# Altium PCB CH592F-3MODE-MS-T0-1v2.PcbDoc
Units mil, origin at the board's own origin, x right, y up, seen from the top; angles counter-clockwise.
Board outline 1755.91 x 3080.25 mil, 2 copper layers (Top Layer, Bottom Layer); 61 components, 52 nets, 224 pads, 409 vias.
Unrouted connection lines stored in the file: 37.
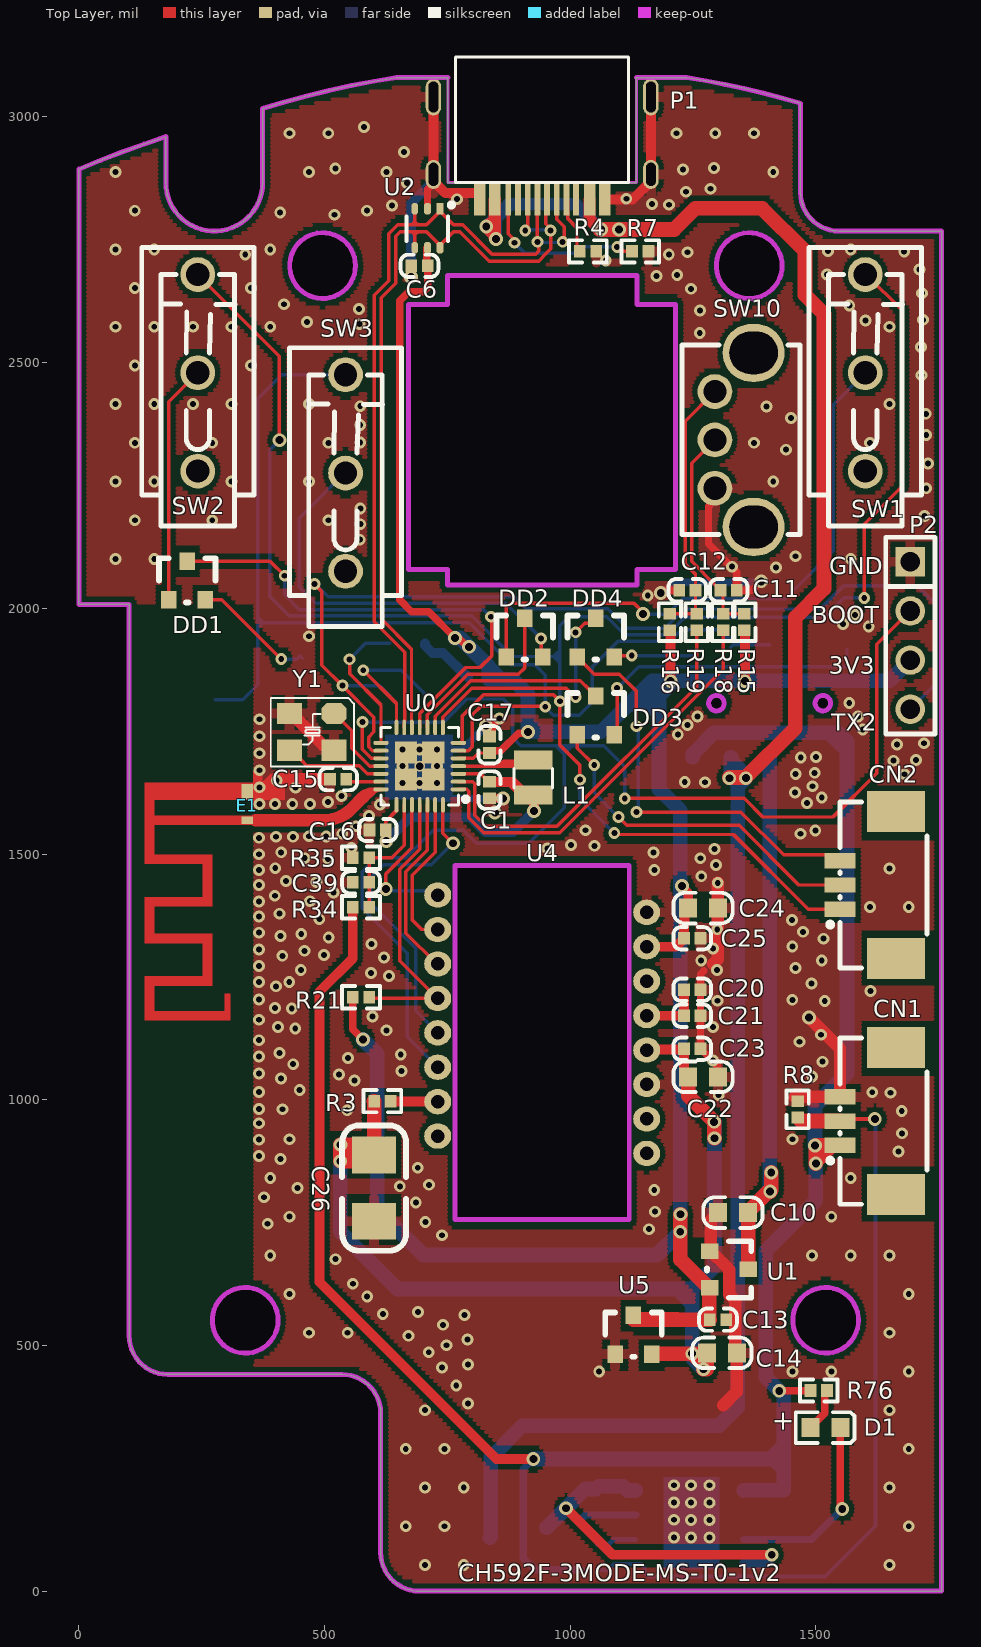
[diagram p0: Top Layer view]
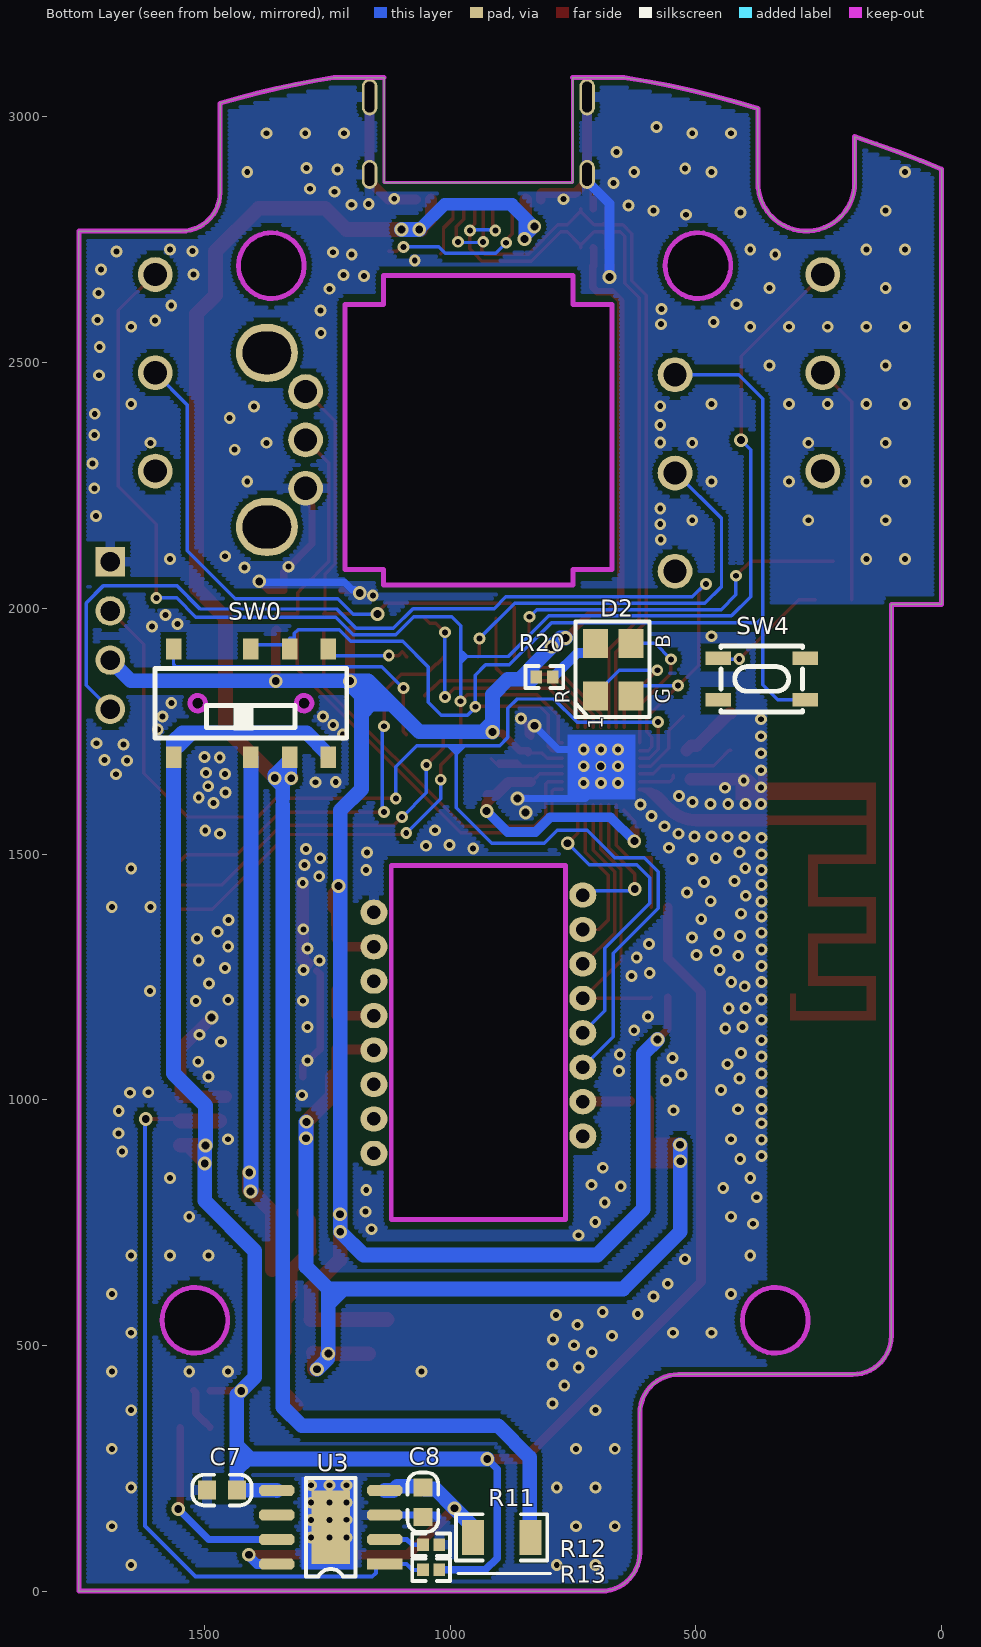
[diagram p1: Bottom Layer view, seen from below]

## Layer stack, top to bottom
Top Solder: solder mask 0.4, Solder Resist, Dk 3.5
Top Layer: signal copper 1.4
Dielectric 1: dielectric 12.6, FR-4, Dk 4.8
Bottom Layer: signal copper 1.4
Bottom Solder: solder mask 0.4, Solder Resist, Dk 3.5

## Board outline
181.1,440.94 535.43,440.94 cw(c535.43,362.2) 614.17,362.2 614.17,78.74 ccw(c692.91,78.74) 692.91,0 1755.91,0 1755.9,2767.72 1547.24,2767.72 cw(c1547.24,2846.46) 1468.5,2846.46 1468.5,3027.86 ccw(c961.44,1325.44) 1237.1,3080.25 1134.75,3080.25 1134.65,3080.15 1134.65,2866.41 751.18,2866.41 751.18,3080.16 ccw(c751.09,3080.16) 751.09,3080.25 750.99,3080.25 646.55,3080.25 ccw(c919.24,1285.52) 373.97,3017.03 374.02,3016.68 374.02,2866.14 cw(c275.59,2866.14) 177.17,2866.14 177.17,2960.1 176.96,2960.07 ccw(c982.43,543.44) 0,2893.7 0,2007.87 102.36,2007.87 102.36,519.69 ccw(c181.1,519.69)
cut-out: 496,2630.5 cw(c496,2697.43) 429.07,2697.43 cw(c496,2697.43) 496,2764.36 cw(c496,2697.43) 562.93,2697.43 cw(c496,2697.43)
cut-out: 1364.19,2630.5 cw(c1364.19,2697.43) 1297.26,2697.43 cw(c1364.19,2697.43) 1364.19,2764.36 cw(c1364.19,2697.43) 1431.12,2697.43 cw(c1364.19,2697.43)
cut-out: 1452.74,551.18 ccw(c1519.67,551.18) 1519.67,484.25 ccw(c1519.67,551.18) 1586.6,551.18 ccw(c1519.67,551.18) 1519.67,618.11 ccw(c1519.67,551.18)
cut-out: 271.67,551.18 ccw(c338.6,551.18) 338.6,484.25 ccw(c338.6,551.18) 405.53,551.18 ccw(c338.6,551.18) 338.6,618.11 ccw(c338.6,551.18)
cut-out: 765.75,755.91 1120.08,755.91 1120.08,1476.38 765.75,1476.38
cut-out: 671.26,2078.74 671.26,2618.11 750,2618.11 750,2677.17 1135.83,2677.17 1135.83,2618.11 1214.57,2618.11 1214.57,2078.74 1135.83,2078.74 1135.83,2047.24 750,2047.24 750,2078.74

## Design rules (kind name [scope] priority, off if disabled: settings)
Clearance Clearance_2 [InNet('ANT') vs InPolygon] p1: gap=6 ignorepadtopadclearanceinfootprint=FALSE
Clearance Clearance_1 [InPolygon] p2: gap=10 ignorepadtopadclearanceinfootprint=FALSE
Clearance [All] p3: gap=6 ignorepadtopadclearanceinfootprint=FALSE except(8: Arc-Via Track-Via SMDPad-Via THPad-Via Via-Via Via-Fill Via-Poly Via-Region Via-Hole)
ComponentClearance [All] p1 off: gap=10 collisioncheckmode=3 verticalgap=10 showdistances=FALSE
DiffPairsRouting [All] p1: maxlimit=10 minlimit=7 mostfreqgap=8 toplayer_minwidth=6 toplayer_maxwidth=15 toplayer_prefwidth=8 bottomlayer_minwidth=6 bottomlayer_maxwidth=15 bottomlayer_prefwidth=8 maxuncoupledlength=500
MinimumSolderMaskSliver [All] p1 off: minsoldermaskwidth=10
PolygonConnect PolygonConnect_1 [IsVia] p1: connectstyle=Direct reliefconductorwidth=10 reliefentries=4 polygonreliefangle="90 Angle" airgapwidth=10
PolygonConnect [All] p2: connectstyle=Relief reliefconductorwidth=20 reliefentries=4 polygonreliefangle="90 Angle" airgapwidth=10
RoutingVias [All] p1: holewidth=16 width=28 viastyle="Through Hole" minholewidth=12 minwidth=24 maxholewidth=28 maxwidth=50
SilkToSilkClearance [All] p1 off: silktosilkclearance=10
SilkToSolderMaskClearance [IsPad] p1 off: minsilkscreentomaskgap=10 clearancetoexposedcopper=TRUE
SolderMaskExpansion [All] p1: expansion=2 istentingtop=FALSE
Width [All] p1: maxlimit=100 minlimit=6 preferedwidth=10
25 further rules are at their usual default settings.

## Classes and differential pairs
differential pair UD: +UD+ -UD-

## Components (designator, comment, footprint, x,y, rotation, side; value= is the part's Value field where it differs from the comment)
C1 "4.7uF" 0402_C 835.7,1613.42 r180 top
C6 "0.1uF" 0402_C 676.58,2697.03 r90 top
C7 "10uF" 0603_C 1434.35,205.72 r0 bottom
C8 "10uF" 0603_C 1055.74,211.33 r270 bottom
C10 "10uF" 0603_C 1361.35,770.47 r180 top
C11 "10nF" 0402_C 1339.15,2037.01 r270 top
C12 "10nF" 0402_C 1221.48,2037.01 r90 top
C13 "2.2uF" 0402_C 1284.01,552.47 r90 top
C14 "10uF" 0603_C 1278.24,484.96 r0 top
C15 "0.47uF" 0402_C 544.55,1652.45 r270 top
C16 "0.1uF" 0402_C 624.88,1548.88 r270 top
C17 "2.2uF" 0402_C 835.7,1739.16 r0 top
C20 "4.7uF" 0402_C 1231.5,1224.03 r90 top
C21 "100nF" 0402_C 1231.5,1170.88 r90 top
C22 "10uF" 0603_C 1239.97,1046.57 r0 top
C23 "100nF" 0402_C 1231.5,1103.74 r90 top
C24 "10uF" 0603_C 1239.97,1390.05 r0 top
C25 "100nF" 0402_C 1231.5,1328.71 r90 top
C26 "33uF" 3528_C 600.92,887.83 r90 top
C39 "0.1uF" 0402_C 590.83,1442.34 r270 top
CN1 "YTC-A1251-03ABW" CONN-SMD_3P-P1.25_YTC-A1251-03ABW 1606.08,956.7 r90 top
CN2 "YTC-A1251-03ABW" CONN-SMD_3P-P1.25_YTC-A1251-03ABW 1606.08,1437.01 r90 top
D1 "LED" 0603+ 1488.97,332.96 r0 top
D2 "RGB" RGB 704.23,1821.93 r90 bottom
DD1 "DIODE" SOT-23 220.3,2056.77 r0 top
DD2 "DIODE" SOT-23 907.03,1940.39 r0 top
DD3 "DIODE" SOT-23 1051.8,1782.24 r0 top
DD4 "DIODE" SOT-23 1051.8,1940.39 r0 top
E1 "ANTENNA" ANT-F-1-2.4G-1.0mmFR4 342.49,1568.85 r90 top
L1 "10uH" SMD_2x2mm 924.65,1655.74 r270 top
P1 "TYPE-C-Receptacle-2.0" TYPE-C-Receptacle-2.0-6.5*8.94*3.16-SinkDown 1069.88,2829.92 r270 top
P2 "DEBUG" SIP4-2.54mm 1692.03,2094.7 r0 top
R3 "5.6Ω" 0402 600.85,997.18 r0 top
R4 "5.1K" 0402 1019.29,2726.36 r0 top
R7 "5.1K" 0402 1159.23,2726.36 r180 top
R8 "0Ω(NC)" 0402 1462.69,963.79 r90 top
R11 "400mΩ" 1206 836.72,109.38 r0 bottom
R12 "3.3k" 0402 1055.66,94.39 r180 bottom
R13 "NC(3.3k)" 0402 1022.19,43.25 r0 bottom
R15 "NC" 0402 1354,1988.71 r270 top
R16 "NC" 0402 1202.7,1955.24 r90 top
R18 "100Ω" 0402 1311.32,1988.71 r270 top
R19 "100Ω" 0402 1257.5,1955.24 r90 top
R20 "1K" 0402 825.2,1860.25 r180 bottom
R21 "10K" 0402 557.37,1208.58 r0 top
R34 "300K" 0402 590.83,1391.69 r180 top
R35 "150K" 0402 557.37,1492.52 r0 top
R76 "1K" 0402 1522.44,408.32 r180 top
SW0 "HX MSS23C02-H2.0 125" SW-SMD_HX-MSS23C02-H2.0-125 1405.77,1807.07 r0 bottom
SW1 "3JWD-DBHD-13.5 125" SW-TH_SHOU-HAN_3JWD-DBHD-13.5 1600.4,2479.3 r270 top
SW2 "3JWD-DBHD-13.5 125" SW-TH_SHOU-HAN_3JWD-DBHD-13.5 242.14,2479.3 r270 top
SW3 "3JWD-DBHD-13.5 125" SW-TH_SHOU-HAN_3JWD-DBHD-13.5 542.7,2275.35 r270 top
SW4 "TS-1089S-02526" SW-SMD_4P-L4.2-W3.3-P2.15-LS5.1 366.13,1856.28 r180 bottom
SW10 "EC10E1260507" SW-TH_EC10EXXXXXXX 1347.54,2342.8 r270 top
U0 "CH592F" QFN28_4X4 693.62,1678.88 r90 top
U1 "6219P33M" SOT-23 1323.05,654.74 r270 top
U2 "CH412K" SOT-363 734.97,2812.81 r180 top
U3 "TP4056" ESOP8 1133.3,55 r90 bottom
U4 "PAW3395DM-T6QU" DIP-16_PAW3395DM-T6QU 942.91,1140.23 r180 top
U5 "6219P18M" SOT-23 1128.68,521.78 r0 top
Y1 "32M" XT3225 519.46,1786.02 r180 top

## Footprints (in the part's own frame and the unit in brackets; to place one, negate y for a bottom-side part, rotate by r counter-clockwise, add the part's x,y. Pads: shape width x height; smd on the part's side, far side on the other; paste and mask are expansions set on the pad)
0402 [mm]
  rect 0.6x0.65 smd mask+0.051: 1(0,0) 2(0.85,0)
  silkscreen extent -0.55,-0.58 1.4,0.57
0402_C [mm]
  rect 0.65x0.6 smd mask+0.051: 1(0,0) 2(0,-0.85)
  silkscreen extent -0.58,-1.4 0.57,0.55
0603+ [mm]
  rect 0.93x0.98 smd: 1(0,0) 2(1.54,0)
  silkscreen extent -0.76,-0.79 2.27,0.79
0603_C [mm]
  rect 0.93x0.98 smd mask+0.051: 1(0,0) 2(1.54,0)
  silkscreen extent -0.76,-0.79 2.31,0.79
1206 [mm]
  rect 1.13x1.8 smd: 1(0,0) 2(2.98,0)
  silkscreen extent -0.87,-1.2 3.84,1.2
3528_C [mil]
  rect 75x90 smd: 1(0,0) 2(-135,0)
  silkscreen extent -195,-65 60,65
ANT-F-1-2.4G-1.0mmFR4 [mm]
  rect 0.8x0.6 smd mask+0: 0(1.483,0)
  rect 0.4x0.6 smd mask+0: 1(0,0)
  Top Layer region: -8.96,1.16 -10.36,1.16 -10.36,0.86 -8.96,0.86
  Top Layer region: 0.24,5.03 -0.26,5.03 -0.26,-0.3 0.24,-0.3
  Top Layer region: 1.939,5.005 1.039,5.005 1.039,-0.3 1.939,-0.3
  Top Layer region: 1.94,5.3 -2.26,5.3 -2.26,4.8 1.94,4.8
  Top Layer region: -1.76,4.98 -2.26,4.98 -2.26,1.8 -1.76,1.8
  Top Layer region: -1.85,2.3 -4.39,2.3 -4.39,1.8 -1.85,1.8
  Top Layer region: -3.96,4.98 -4.46,4.98 -4.46,1.8 -3.96,1.8
  Top Layer region: -3.96,5.3 -6.36,5.3 -6.36,4.8 -3.96,4.8
  Top Layer region: -5.86,4.98 -6.36,4.98 -6.36,1.8 -5.86,1.8
  Top Layer region: -5.875,2.3 -8.364,2.3 -8.364,1.8 -5.875,1.8
  Top Layer region: -8.06,4.98 -8.56,4.98 -8.56,1.8 -8.06,1.8
  Top Layer region: -8.06,5.3 -10.36,5.3 -10.36,4.8 -8.06,4.8
  Top Layer region: -9.86,4.98 -10.36,4.98 -10.36,0.86 -9.86,0.86
CONN-SMD_3P-P1.25_YTC-A1251-03ABW [mm]
  rect 0.8x1.6 smd paste+0 mask+0.05: 1(-1.25,1.45) 2(0,1.45) 3(1.25,1.45)
  rect 2.1x3 smd paste+0 mask+0.05: 4(-3.8,-1.45) 5(3.8,-1.45)
  silkscreen extent -4.3,-3.05 4.3,2.08
DIP-16_PAW3395DM-T6QU [mm]
  oval 1.397x1.3 hole 0.7 paste+0 mask+0.051: 1(-5.4,6.332) 2(-5.4,4.552) 3(-5.4,2.772) 4(-5.4,0.992) 5(-5.4,-0.788) 6(-5.4,-2.568) 7(-5.4,-4.348) 8(-5.4,-6.128) 9(5.4,-7.018) 10(5.4,-5.238) 11(5.4,-3.458) 12(5.4,-1.678) 13(5.4,0.102) 14(5.4,1.882) 15(5.4,3.662) 16(5.4,5.442)
ESOP8 [mil]
  rect 149.61x78.74 smd: 0(75,110)
  rect 22x72 smd: 1(0,0)
  oct 22x72 smd: 2(50,0) 3(100,0) 4(150,0) 5(150,220) 6(100,220) 7(50,220) 8(0,220)
  silkscreen extent -25,60 175,160
QFN28_4X4 [mm]
  rect 1.143x1.143 smd mask+0: 0(-0.699,-0.699) 0(-0.699,0.698) 0(0.699,-0.699) 0(0.699,0.698)
  round 0.559 hole 0.381 mask+0.051: 0(0,0)
  oval 0.2x0.8 smd mask+0.051: 1(-1.2,-2) 2(-0.8,-2) 3(-0.4,-2) 4(0,-2) 5(0.4,-2) 6(0.8,-2) 7(1.2,-2) 15(1.2,2) 16(0.8,2) 17(0.4,2) 18(0,2) 19(-0.4,2) 20(-0.8,2) 21(-1.2,2)
  oval 0.8x0.2 smd mask+0.051: 8(2,-1.2) 9(2,-0.8) 10(2,-0.4) 11(2,0) 12(2,0.4) 13(2,0.8) 14(2,1.2) 22(-2,1.2) 23(-2,0.8) 24(-2,0.4) 25(-2,0) 26(-2,-0.4) 27(-2,-0.8) 28(-2,-1.2)
  silkscreen extent -2,-2.51 2,2
RGB [mm]
  rect 1.5x1.3 smd: 1(0,0) 2(2.71,0) 3(0,-1.825) 4(2.71,-1.825)
  silkscreen extent -1.09,-2.79 3.84,1.04
SIP4-2.54mm [mil]
  rect 60x60 hole 40: 1(0,0)
  round 60 hole 40: 2(0,-100) 3(0,-200) 4(0,-300)
  silkscreen extent -50,-350 50,50
SMD_2x2mm [mm]
  rect 1x2 smd: 1(-0.905,0) 2(0.905,0)
  silkscreen extent -0.47,-1 0.53,1
SOT-23 [mm]
  rect 0.8x0.9 smd: 1(-0.95,-1) 2(0.95,-1) 3(0,1)
  silkscreen extent -1.46,-1.14 1.46,1.15
SOT-363 [mm]
  rect 0.35x0.6 smd mask+0.051: 1(0,0)
  oct 0.35x0.6 smd mask+0.051: 2(0.65,0) 3(1.3,0) 4(1.3,2) 5(0.65,2) 6(0,2)
  silkscreen extent -0.7,-0.31 1.73,1.65
SW-SMD_4P-L4.2-W3.3-P2.15-LS5.1 [mm]
  rect 1.3x0.7 smd: 1(-2.25,1.075) 2(2.25,1.075) 3(-2.25,-1.075) 4(2.25,-1.075)
  silkscreen extent -2.1,-1.7 2.1,1.7
SW-SMD_HX-MSS23C02-H2.0-125 [mm]
  rect 0.8x1.1 smd paste+0 mask+0.05: 1(-4,2.8) 2(-2,2.8) 3(0,2.8) 4(4,2.8) 5(-4,-2.8) 6(-2,-2.8) 7(0,-2.8) 8(4,-2.8)
  Keep-Out Layer board cut-out: -2.35,0 -2.406,0.197 -2.552,0.34 -2.75,0.393 -2.948,0.34 -3.094,0.197 -3.15,0 -3.15,0 -3.094,-0.197 -2.948,-0.34 -2.75,-0.393 -2.552,-0.34 -2.406,-0.197 -2.35,0
  Keep-Out Layer board cut-out: 3.15,0 3.11,0.174 2.999,0.313 2.839,0.39 2.661,0.39 2.501,0.313 2.39,0.174 2.35,0 2.35,0 2.39,-0.174 2.501,-0.313 2.661,-0.39 2.839,-0.39 2.999,-0.313 3.11,-0.174 3.15,0
  Multi-Layer pour cut-out: -2.35,0 -2.406,0.197 -2.552,0.34 -2.75,0.393 -2.948,0.34 -3.094,0.197 -3.15,0 -3.15,0 -3.094,-0.197 -2.948,-0.34 -2.75,-0.393 -2.552,-0.34 -2.406,-0.197 -2.35,0
  Multi-Layer pour cut-out: 3.15,0 3.11,0.174 2.999,0.313 2.839,0.39 2.661,0.39 2.501,0.313 2.39,0.174 2.35,0 2.35,0 2.39,-0.174 2.501,-0.313 2.661,-0.39 2.839,-0.39 2.999,-0.313 3.11,-0.174 3.15,0
  silkscreen extent -4.95,-1.8 4.95,1.8
SW-TH_EC10EXXXXXXX [mm]
  oval 3x3.2 hole 2.2 slot 2.5 at 90 deg paste+0 mask+0.051: 4(-4.5,0.65) 5(4.5,0.65)
  round 1.8 hole 1.2 paste+0 mask+0.051: A(-2.5,-1.35) B(0,-1.35) C(2.5,-1.35)
  silkscreen extent -4.9,-3.05 4.9,3.05
SW-TH_SHOU-HAN_3JWD-DBHD-13.5 [mm]
  round 1.8 hole 1.2: 1(-5.08,0) 2(0,0) 3(5.08,0)
  silkscreen extent -6.48,-2.9 7.92,2.9
TYPE-C-Receptacle-2.0-6.5*8.94*3.16-SinkDown [mm]
  oval 1.9x0.8 hole 0.5 slot 1.6 at 0 deg mask+0.051: 0(-5.352,2.395) 0(-5.352,-8.845)
  oval 1.5x0.8 hole 0.5 slot 1.2 at 0 deg mask+0.051: 0(-1.352,2.395) 0(-1.352,-8.845)
  rect 1.65x0.6 smd mask+0.051: A1(-0.05,0) A4(-0.05,-0.775) B1(-0.05,-6.45) B4(-0.05,-5.675)
  rect 1.65x0.3 smd mask+0.051: A5(-0.05,-1.975) A6(-0.05,-2.975) A7(-0.05,-3.475) A8(-0.05,-4.475) B5(-0.05,-4.975) B6(-0.05,-3.975) B7(-0.05,-2.475) B8(-0.05,-1.475)
  Keep-Out Layer lines w0.152: -6.358,-8.095 -0.927,-8.095 -0.927,1.645 -6.356,1.645
  silkscreen extent -7.43,-7.69 -0.93,1.25
XT3225 [mm]
  oct 1.3x1.1 smd: 1(0,0)
  rect 1.3x1.1 smd: 2(2.3,0) 3(2.3,1.9) 4(0,1.9)
  silkscreen extent -1.02,-0.8 3.27,2.74

## Part data
C1 C6 C7 C8 C11 C12 C15 C16 C17 C39: library part CAP, "Capacitor"
C10 C13 C14 C20 C21 C22 C23 C24 C25 C26: library part Cap, "Capacitor", LatestRevisionDate=17-Jul-2002, LatestRevisionNote="Re-released for DXP Platform.", PackageDescription="Radial Cap, Thru-Hole; 2 Leads; 0.3 in Pin Spacing", PackageReference=RAD-0.3, Published=8-Jun-2000, Publisher="Altium Limited"
CN1 CN2: Current Rating (Max)=1A, JLCPCB Part Class="Extended Part", LCSC Part Name="1.25mm 1x3P卧贴", Manufacturer=YIYUAN(怡远), Operating Temperature Range=-25℃~+85℃, Add into BOM=yes, Convert to PCB=yes, Datasheet=https://atta.szlcsc.com/upload/public/pdf/source/20230703/1435987A1D1278BD8E0276EA6FE76C2F.pdf, Device=YTC-A1251-03ABW, Manufacturer Part=YTC-A1251-03ABW, Mounting Style=卧贴, Number of Pins=3P, Number of PINs Per Row=3, Number of Rows=1, Pins Structure=1x3P, Pitch=1.25mm, Supplier=LCSC, Supplier Footprint=P=1.25mm, Supplier Part=C7436576, Symbol=YTC-A1251-03ABW
D1: library part LED0, "Typical INFRARED GaAs LED", LatestRevisionDate=08-Jul-2005, LatestRevisionNote="Mech Layer 1 removed.", PackageDescription="LED; 2 Leads", PackageReference=LED-0, Published=8-Jun-2000, Publisher="Altium Limited"
D2: "共阳"
DD1 DD2 DD3 DD4: "Diode"
E1: "Generic Antenna"
L1: library part INDUCTOR
P1: "Type-C USB2.0 母座"
P2: library part "Header 4", "Header, 4-Pin", LatestRevisionDate=17-Jul-2002, LatestRevisionNote="Re-released for DXP Platform.", Publisher="Altium Limited"
R3 R20 R21: library part Res2, "Resistor", LatestRevisionDate=17-Jul-2002, LatestRevisionNote="Re-released for DXP Platform.", PackageDescription="Axial Device, Thru-Hole; 2 Leads; 0.4 in Pin Spacing", PackageReference=AXIAL-0.4, Published=8-Jun-2000, Publisher="Altium Limited"
R4 R7: library part RES2
R8 R11 R12 R13 R15 R16 R18 R19 R34 R35 R76: library part RES
SW0: Current Rating (DC)=100mA, LCSC Part Name="小型8脚3档位 立贴拨动 柄长2.0MM", Manufacturer=hanxia(韩下), Operating Temperature=-25℃~+70℃, Voltage Rating (DC)=12V, Actuator Style=矩形柱状, Add into BOM=yes, Circuit=双刀三掷, Convert to PCB=yes, Datasheet=https://atta.szlcsc.com/upload/public/pdf/source/20231016/0AB1F9BA5921398E4CF86D5ACEC95738.pdf, Device="HX MSS23C02-H2.0 125", Manufacturer Part="HX MSS23C02-H2.0 125", Mechanical Life=1万次, Mounting Style=立贴, Pin Style=SMD接片, Supplier=LCSC, Supplier Footprint=SMD,9.9x3.5mm, Supplier Part=C18357575, Symbol="HX MSS23C02-H2.0 125"
SW1 SW2 SW3: Contact Current (AC)=-, Contact Current (DC)=100mA, JLCPCB Part Class="Extended Part", LCSC Part Name="12.8*5.7*6.6mm 插件微动开关", Manufacturer="SHOU HAN(首韩)", Operating Temperature=-25℃~+85℃, Voltage Rating (DC)=125V, Actuator Style=脚按动, Add into BOM=yes, Circuit=单刀双掷, Convert to PCB=yes, Datasheet=https://atta.szlcsc.com/upload/public/pdf/source/20211019/52ACE125E0FDD69DD4046775F52831F0.pdf, Device="3JWD-DBHD-13.5 125", Manufacturer Part="3JWD-DBHD-13.5 125", Mechanical Life=100万次, Pin Style=PC引脚, Supplier=LCSC, Supplier Footprint=插件, Supplier Part=C2906291, Switch Height=6.6mm, Switch Length=12.8mm, Switch Width=5.7mm, Symbol="3JWD-DBHD-13.5 125", Type=微动开关, Voltage Rating (AC)=-
SW4: Contact Current=50mA, JLCPCB Part Class="Extended Part", LCSC Part Name="4.2*3.25*2.5mm 立贴 轻触开关", Manufacturer=XUNPU(讯普), Voltage Rating (DC)=12V, Actuator Style=椭圆形按钮, Add into BOM=yes, Circuit=单刀单掷, Convert to PCB=yes, Datasheet=https://atta.szlcsc.com/upload/public/pdf/source/20191118/C455282_2E86A26A9CC4FEF4662951C4D45ED672.pdf, Device=TS-1089S-02526, Manufacturer Part=TS-1089S-02526, Mechanical Life=-, Mounting Style=立贴, Supplier=LCSC, Supplier Footprint=SMD,3.3x4.2mm, Supplier Part=C455282, Switch Height=2.5mm, Switch Length=4.2mm, Switch Width=3.25mm, Symbol=TS-1089S-02526, With Lamp=-
U0: "RISC-V MCU with BLE/USB/ADC/SPI/4*UART/I2C/LCD"
U2: "Qaud ESD protect, high speed"
U5: library part 6219P33M
Y1: library part XTAL, "Crystal Oscillator", LatestRevisionDate=17-Jul-2002, LatestRevisionNote="Re-released for DXP Platform.", PackageDescription="Crystal, Thru-Hole; 2 Leads; Body 3.1 x 8.2 mm (Dia.xH)", PackageReference=R38, Published=8-Jun-2000, Publisher="Altium Limited"

## Via types
v1: diameter 24, hole 12, Top Layer to Bottom Layer, tented both sides, 365 vias
v2: diameter 28, hole 16, Top Layer to Bottom Layer, tented both sides, 44 vias

## Nets (pads, with @x,y where several pads share a name; then routed paths per layer and width w, separated by ;. In a path a pad name is that pad's centre, name@x,y a point inside that pad or via, vN(x,y) a via of type N, cw(c..) or ccw(c..) an arc to the next point about the centre after c; other vN are vias at no path point)
2.4G: DD3.2 SW0.8 | length 617.1
  Top Layer w7: DD3.2 1095.77,1749.43 1095.35,1749.86 v1(1095.35,1837.67)
  Bottom Layer w7: v1(1095.35,1837.67) 1139.25,1881.58 1559.15,1881.58 1563.25,1885.68 SW0.8
+1.9V: C14.1 C22.1 C23.1 C26.1 R3.1 U4.4 U5.2 | length 2341.7
  Top Layer w20: U4.4 1156.79,1102.46 1219.39,1102.46 ; C23.1 1231.5,1076.94 1231.66,1076.78 1231.66,1054.88 C22.1
  Top Layer w30: R3.1 600.92,997.1 C26.1 ; U5.2@1166.08,483.35 v2(1248.12,483.35) ; C22.1 1239.97,1007.96 v2(1292.85,955.08) 1292.85,922.34 v2(1293.4,921.79) ; C14.1@1276.63,483.35 v2(1248.12,483.35) ; C14.1 1277.11,483.83 1277.11,451.5 v2(1271.08,451.5) 1271.08,460.39 v2(1248.12,483.35) ; 531.9,891.27 C26.1@597.47,891.27 ; 531.9,891.27 531.9,907.63 v2(532.71,908.44) 580.3,908.44 C26.1@597.47,891.27 ; 531.9,891.27 v2(531.9,874.92) 588.01,874.92 C26.1 ; C26.1@597.47,891.27 C26.1
  Bottom Layer w30: v2(532.71,908.44) 531.9,907.63 v2(531.9,874.92) 531.9,731.28 648.06,615.13 1216.41,615.13 ; v2(1271.08,451.5) 1249.65,472.93 1249.65,481.82 v2(1248.12,483.35) 1248.12,583.42 ; v2@1293.4,954.53 v2(1293.4,921.79) 1293.4,660.41 1248.12,615.13 ; 1216.41,615.13 1248.12,583.42 ; 1216.41,615.13 1248.12,615.13 ; 1248.12,583.42 1248.12,615.13
+3V3: C6.2 C13.1 C17.2 C24.1 C25.1 P2.3 R15.2 R16.1 R20.1 R21.1 U0.5 U1.2 U2.5 U4.7 U5.3 | length 5651.2
  Top Layer w7: U0.5 802.83,1694.63 813.9,1705.7 C17.2 840.99,1705.7 C17.2@842.7,1705.7
  Top Layer w15: R21.1 557.37,1143.41 v2(578.1,1122.67) ; C6.2@708.06,2697.03 708.06,2732.75 U2.5 ; C6.2 710.04,2653.42 701.26,2644.63 671.62,2644.63 652.76,2625.77 652.76,2017.63 676.95,1993.44 711.81,1993.44 v2(765.46,1939.79) 767.94,1937.3 775.17,1937.3 790.81,1921.66 v2(794.19,1921.66) ; C17.2@840.99,1705.7 840.99,1710.01 858.54,1710.01 894.6,1746.07 911.89,1746.07 v2(914.05,1748.23)
  Top Layer w20: U4.7 1215.19,1311.41 1231.5,1327.73 C25.1 1231.5,1355.51 1232.76,1356.76 1232.76,1382.84 C24.1 1239.97,1420.22 1227.58,1432.61 v2(1227.58,1434.78) ; R16.1 1204.34,1953.6 v2(1204.34,1851.81) ; R15.2 1355.3,1953.95 v2(1355.3,1851.81)
  Top Layer w30: U5.3@1128.68,552.74 1217.98,552.74 1218.25,552.47 C13.1 ; v2(1224.42,766.88) 1224.42,765.33 1223.92,764.84 v2(1223.92,731.45) 1223.92,675.13 1281.72,617.34 U1.2@1282.75,617.34 ; C13.1@1282.75,552.79 U1.2@1282.75,617.34 ; U1.2 U1.2@1282.75,617.34
  Bottom Layer w20: v2(914.05,1748.23) 940.93,1748.23 ; 914.05,1775.86 940.93,1748.99 ; 960.84,1748.23 1062.53,1748.23 1063.28,1748.99
  Bottom Layer w30: v2(578.1,1122.67) 607.1,1093.67 607.1,777.64 700.62,684.13 1176.6,684.13 v2(1223.92,731.45) 1223.92,1588.83 1180.76,1631.99 1180.76,1785.18 ; v2(765.46,1939.79) 775.7,1939.79 834.62,1880.87 ; v2(914.05,1748.23) v2@914.05,1748.99 ; 1149.67,1816.27 1140.12,1825.82 ; v2@1204.34,1852.66 1186.07,1852.66 ; P2.3 1649.99,1852.66 1210.77,1852.66 1180.76,1822.65 1180.76,1785.18 ; 858.33,1855.88 833.98,1880.23 833.98,1855.88 858.33,1855.88 ; 858.33,1855.88 882.67,1855.88 914.05,1824.5 914.05,1775.86 v2@914.05,1748.99 ; v2@914.05,1748.99 940.93,1748.99 1063.28,1748.99 1119.11,1804.81 ; 1119.11,1804.81 1159.75,1804.81 1160.44,1805.5 ; 1119.11,1804.81 1140.12,1825.82 ; 1140.12,1825.82 1166.96,1852.66 1186.07,1852.66 ; 1160.44,1805.5 1159.75,1806.19 1159.75,1826.34 1186.07,1852.66 ; 1160.44,1805.5 1180.76,1785.18
ADC: C39.1 R34.1 R35.2 U0.23 | length 264.7
  Top Layer w7: R34.1 R35.2 636.49,1492.52 662.12,1518.15 U0.23
ANT: E1.1 U0.21 | length 362.4
  Top Layer w8: 571.6,1620.95 cw(c597.4,1595.15) 597.4,1631.64 U0.21 ; 578.48,1615.82 579.75,1617.09 cw(c614.88,1581.96) U0.21 ; 583.16,1608.47 600.29,1625.6 cw(c614.88,1611.01) U0.21
  Top Layer w25: 359.5,1568.85 498.64,1568.85 ccw(c498.64,1648.2) 554.75,1592.09 578.48,1615.82
B: D2.4 U0.15 | length 291.4
  Top Layer w7: v1(550.98,1896.26) 550.98,1867.27 614.88,1803.37 U0.15
  Bottom Layer w7: v1(550.98,1896.26) 583.33,1928.62 D2.4
Back: CN2.3 DD4.1 | length 854.8
  Top Layer w7: DD4.1 1014.4,1899.05 1026.65,1886.81 1028.62,1886.81 1049.11,1866.31 1099.94,1866.31 1134.75,1831.5 v1(1134.75,1760.07) ; v1(1134.64,1585.45) 1347.23,1585.45 1434.2,1498.47 1536.75,1498.47 CN2.3
  Bottom Layer w7: v1(1134.64,1585.45) 1138.33,1589.13 1138.33,1756.5 v1(1134.75,1760.07)
BLE: DD4.2 SW0.5 | length 173.9
  Top Layer w7: DD4.2 1088.32,1901.91 1097.87,1911.45 1105.43,1903.89 v1(1125.12,1903.89)
  Bottom Layer w7: v1(1125.12,1903.89) SW0.5@1253.87,1903.89
BOOT: P2.2 U0.17 U4.14 | length 2879
  Top Layer w7: v1(577.06,1768.5) 576.63,1768.07 576.63,1712.91 594.91,1694.63 U0.17 ; v1(1110.84,1613.15) 1354.32,1613.15 1392.02,1575.45 1534.63,1575.45 1623.97,1664.78 1623.97,1926.64 P2.2
  Bottom Layer w7: v1(577.06,1768.5) 742.04,1768.5 789.11,1815.57 863.95,1815.57 882.66,1796.87 882.66,1737.19 899.63,1720.23 970.71,1720.23 ; U4.14 668.53,1127.91 668.53,1297.84 576.74,1389.63 576.74,1464.31 605.18,1492.75 665.07,1492.75 720.91,1548.59 782.25,1548.59 808.98,1521.87 915.74,1521.87 987.86,1593.99 987.86,1704.34 ; 995,1720.11 987.86,1712.97 ; 1003.13,1719.61 987.86,1704.34 ; v1(1110.84,1613.15) 1110.84,1677.87 1068.48,1720.23 1003.13,1720.23 995,1720.23 987.86,1720.23 ; 970.71,1720.23 979,1720.23 ; 970.71,1720.23 987.23,1703.7 987.86,1704.34 ; 979,1720.23 987.86,1720.23 ; 979,1720.23 987.86,1711.36 ; 987.86,1704.34 987.86,1711.36 ; 987.86,1711.36 987.86,1712.97 ; 987.86,1712.97 987.86,1720.23
COM_H: CN2.1 SW1.1 SW2.1 U0.7 | length 4079.4
  Top Layer w7: SW2.1 408.23,2513.22 v2(408.23,2342.27) ; U0.7 780.26,1726.13 780.67,1726.53 780.67,1781.26 823.48,1824.08 965.92,1824.08 v1(979,1811) 979,1721.92 1019.63,1681.29 v1(1019.63,1651.37) ; v1(1089.66,1542.71) 1092.53,1539.84 1332.21,1539.84 1484.25,1387.8 CN2.1 ; v1(1598.27,2021.36) 1598.27,2170.73 1675.61,2248.07 1675.61,2606.32 1602.62,2679.3 SW1.1
  Bottom Layer w7: v2(408.23,2342.27) 388.93,2322.97 388.93,2023.4 427.74,1984.58 799.77,1984.58 882.32,1902.04 966.63,1902.04 ; v1(979,1811) 979,1889.67 ; v1(1019.63,1651.37) 1019.63,1612.74 v1(1089.66,1542.71) ; v1(1598.27,2021.36) 1557.07,2021.36 1517.61,1981.91 1233.07,1981.91 1197.28,1946.13 1110.78,1946.13 1074.15,1982.75 997.03,1982.75 979,1964.73 979,1914.14 ; 966.63,1902.04 972.81,1895.85 ; 966.63,1902.04 966.9,1902.04 972.95,1908.09 ; 972.81,1895.85 972.95,1895.99 972.95,1908.09 ; 972.81,1895.85 979,1889.67 ; 972.95,1908.09 979,1914.14 ; 979,1889.67 979,1914.14
COM_S: SW0.6 SW0.7 SW3.1 SW4.4 U0.6 | length 2452.6
  Top Layer w7: U0.6 793,1710.38 800.89,1718.26 800.89,1783.1 818.37,1800.58 947,1800.58 947.86,1799.72 v1(949.05,1799.72)
  Bottom Layer w7: SW4.4 333.51,1813.96 364.27,1844.72 364.27,1959.71 ; 364.27,1985.35 364.27,1981.36 ; SW3.1@535.04,2491.31 519.07,2475.35 412.98,2475.35 364.27,2426.65 364.27,1981.36 ; v1@948.46,1799.12 965.05,1782.53 1018.15,1782.53 1044.74,1809.12 1044.74,1880.72 1097.15,1933.13 1202.67,1933.13 1226.34,1956.8 1309.63,1956.8 1317.13,1949.3 1317.13,1939.4 1327.03,1939.4 ; v1(949.05,1799.72) 949.05,1864.13 928.31,1884.88 879.74,1884.88 794.08,1970.54 375.1,1970.54 ; SW0.6@1327.03,1921.25 1331.94,1926.15 SW0.7@1405.77,1926.15 ; 364.27,1959.71 364.27,1970.38 ; 364.27,1959.71 375.1,1970.54 ; 364.27,1970.38 364.27,1981.36 ; 364.27,1970.38 364.43,1970.54 375.1,1970.54 ; 364.27,1981.36 375.1,1970.54
EA: R18.2 U0.1 | length 824.1
  Top Layer w7: U0.1 788.95,1631.64 793.05,1627.54 793.05,1573.76 823.62,1543.2 978.39,1543.2 1311.32,1876.13 R18.2
EB: R19.1 U0.2 | length 792.9
  Top Layer w7: U0.2 801.95,1647.39 806.05,1643.29 806.05,1579.14 829,1556.2 973,1556.2 1257.5,1840.69 R19.1
Forward: CN2.2 DD3.1 | length 710.5
  Top Layer w7: DD3.1 1014.4,1715.67 v1(1048.77,1681.3) ; v1(1098.01,1575.24) 1114.74,1558.51 1343.85,1558.51 1465.35,1437.01 CN2.2
  Bottom Layer w7: v1(1048.77,1681.3) 1048.77,1624.48 v1(1098.01,1575.24)
G: D2.3 P2.4 U0.16 | length 2105.1
  Top Layer w7: v1(479.71,2049.31) 494.7,2034.32 494.7,1884.57 v1(536.5,1842.77) 600.56,1778.71 600.56,1748.92 589.63,1737.99 589.63,1718.3 597.38,1710.55 614.71,1710.55 U0.16
  Bottom Layer w7: v1(479.71,2049.31) 481.7,2049.31 507.42,2023.58 886.73,2023.58 910.91,1999.4 1075.9,1999.4 1116.17,1959.13 1191.9,1959.13 1231.42,1998.65 1509.31,1998.65 1557.09,2046.43 1705.72,2046.43 1741.21,2010.94 1741.21,1843.87 P2.4 ; v1(536.5,1842.77) 611.16,1842.77 611.35,1842.96 D2.3
GND: C1.1 C6.1 C7.2 C8.2 C10.2 C11.1 C12.1 C13.2 C14.2 C15.2 C16.2 C17.1 C20.2 C21.2 C22.2 C23.2 C24.2 C25.2 C26.2 C39.2 CN1.3 E1.0 P1.0 P1.A1 P1.B1 P2.1 R4.2 R7.1 R8.2 R12.2 R35.1 SW10.C U0.0 U1.1 U2.2 U3.0 U3.3 U4.3 U4.8 U5.1 Y1.2 Y1.4 | length 3459.7
  Top Layer w15: U2.2 709.38,2852.62 721.65,2864.89 P1.0@721.65,2883.14 ; v2@834.73,1761.11 835.7,1760.14 C17.1 836.68,1739.16 840.99,1743.48 840.99,1760.75 v1(856.23,1775.99) ; C1.1@842.7,1613.42 865.34,1613.42 865.34,1612.93 v2(863.28,1612.93) ; v2(1184.31,2031.03) 1190.29,2037.01 C12.1 ; 1272.16,1262.76 1264.97,1255.57 C20.2 C21.2 C23.2 1264.97,1102.75 1269.28,1098.44 1270.26,1098.44 1300.6,1068.11 C22.2 ; SW10.C@1294.39,2268 1283.7,2257.31 1283.7,2210 1281.36,2207.65 1281.36,2131.13 1339.15,2073.34 C11.1 1369.96,2037.01 1387.94,2055 v2(1388.64,2055)
  Top Layer w20: v2(676.09,2674.39) 676.33,2674.64 676.33,2696.78 C6.1 ; P1.0@721.65,3040.63 721.65,2883.14 725.26,2879.53 725.26,2865.46 745.58,2845.14 814.13,2845.14 815.94,2843.33 P1.B1 ; P1.A1 1126.99,2831.89 1164.17,2869.07 1164.17,2883.14 P1.0@1164.17,3040.63
  Top Layer w25: E1.0 371.26,1627.22 396.48,1652.45 C15.2 ; Y1.2 432.84,1786.02 498.49,1720.37 510.3,1720.37 Y1.4 ; U1.1 U1.1@1285.65,692.15 ; 1290.92,1276.72 1300.16,1285.95 v1(1300.16,1441.48) ; C10.2 1300.72,769.49 1285.65,754.42 U1.1@1285.65,692.15 ; 1310.89,378.07 1338.87,406.05 C14.2 1335.63,488.21 1335.63,591.68 1323.54,603.76 1323.54,654.25 U1.1@1285.65,692.15 ; R8.2@1456.42,1005.91 CN1.3 1549,1104.09 v2(1485.6,1167.49)
  Bottom Layer w15: v1(658.62,1712.88) v1(693.62,1712.88) v1(728.62,1712.88) 780.51,1712.88 v2(828.73,1761.11) ; v1(693.62,1644.88) 725.57,1612.93 v2(863.28,1612.93) ; 1026.45,150.7 1030.74,155 U3.3 ; v2(1184.31,2031.03) 1187.82,2031.03 1194.28,2037.48 1199.47,2037.48 1215.22,2053.23 1386.87,2053.23 v2(1388.64,2055)
  Bottom Layer w20: v2(676.09,2674.39) 676.09,2823.79 721.65,2869.36 P1.0@721.65,2883.14
  other v1: 704.53,53.39 783.27,53.39 1649.41,53.39 1211.43,109 1245.68,109 1283.29,109 665.16,132.13 743.9,132.13 1688.78,132.13 1211.43,145.25 1245.68,144.54 1283.29,144.54 1211.43,180.43 1245.68,180.08 1283.29,180.08 704.53,210.87 783.27,210.87 1649.41,210.87 1211.43,215.62 1245.68,215.62 1283.29,215.62 665.16,289.61 743.9,289.61 1688.78,289.61 704.53,368.35 1649.41,368.35 792.14,381.92 767.94,418.64 1058.86,447.09 1452.56,447.09 1531.3,447.09 1688.78,447.09 738.73,455.36 791.77,461.18 712.03,486.24 748.25,500.39 790.81,511.87 671.14,519.62 468.31,525.83 547.05,525.83 1649.41,525.83 741.08,541.99 785.07,562.08 618.56,563.85 689.91,568.29 586.72,599.87 428.94,604.57 1688.78,604.57 557.55,625.57 522.13,675.57 389.57,683.31 1491.93,683.31 1570.67,683.31 1649.41,683.31 738.97,724.28 1160.23,736.63 384.27,747.71 705.07,751.32 428.94,762.05 1531.3,762.05 1172.69,772.29 685.76,790.79 376.5,801.64 1170.99,816.44 444.67,820.62 653.15,823.83 712.79,826.84 389.57,840.79 1570.67,840.79 689.62,861.59 410.15,879.29 366.58,885.76 1667.78,894.46 366.46,918.79 428.94,919.53 1452.56,919.53 1675.23,931.69 366.46,952.1 1674.66,976.95 546.07,978.46 366.46,980.93 414.5,980.64 1302,1009.3 1651.74,1014.19 1614.51,1015.33 366.46,1015.75 449.41,1019.93 560.95,1039.16 411.62,1043.24 1492.33,1047.31 529.34,1051.12 366.46,1053.58 656.57,1058.43 436.16,1072.44 1513.05,1077.53 1290.78,1079.86 547.62,1085.13 366.46,1087.91 654.99,1092.35 408.35,1094.98 1466.43,1118.11 366.46,1121.21 1510.46,1132.35 625.8,1141.25 440.29,1145.17 405.5,1148.26 1290.78,1148 366.46,1162.71 597.41,1169.65 433.25,1185.41 399.02,1186.95 1517.84,1200.68 1299.67,1201.52 1451.98,1203.34 366.46,1204.22 1610.82,1221.34 400.98,1230.8 1491.2,1236.35 366.46,1239.51 428.25,1239.76 631.36,1251.77 594.3,1257.88 451.75,1263.83 1298.45,1264.13 1458.63,1267.87 366.46,1272.3 1266.38,1283.2 1511.91,1283.38 620.77,1289.66 414.1,1292.93 498.84,1294.65 459.35,1303.08 366.46,1305.6 1290.78,1308 1451.98,1311.78 595.52,1316.95 1515.18,1327.75 508.4,1329.91 410.58,1333.34 452.69,1337.32 366.46,1340.03 1473.93,1341.72 1299.06,1346.8 1451.31,1365.67 489.42,1367.47 366.46,1373.06 408.28,1378.63 1610.04,1391.97 1688.78,1391.97 366.46,1403.43 470.1,1404.13 398.84,1415.08 518.21,1421.9 366.46,1437.02 483.85,1443.33 421.59,1444.91 1266.8,1454.7 366.46,1467.39 1171.15,1467.59 399.68,1471.27 1649.41,1470.71 1296.66,1477.67 507.37,1489.92 1264.76,1491.45 459.76,1491.6 366.46,1499.7 1169.52,1502.93 411.73,1503.51 1293.6,1510.08 953.42,1511.23 554.67,1512.9 1049.3,1516.74 1001.78,1518.36 366.46,1533 401.36,1535.31 435.66,1535.09 468.65,1536.19 503.29,1535.81 535.84,1541.44 1468.45,1541.27 1031.03,1548.42 1498.73,1547.64 564.17,1556.51 590.59,1577.43 613,1600.95 367.49,1601.68 399.46,1601.68 434.48,1601.68 470.56,1601.68 1481.61,1604.09 506.93,1605.93 1511.88,1615.19 534.35,1618.06 1457.4,1625.28 440.81,1635.02 367.49,1635.82 1492.71,1638.06 658.62,1644.88 728.62,1644.88 1233.09,1646.48 1274.31,1646.21 402.83,1649.57 1680.13,1662.3 1458.74,1662.61 1497.42,1665.3 367.49,1670.43 658.62,1678.88 728.62,1678.88 1657.72,1690 1703.74,1691.46 1469.17,1696.58 1500.11,1697.25 367.49,1705.05 1664.86,1722.7 1719.71,1725.48 367.49,1739.66 1218.89,1743.25 1595.22,1753.58 1238.37,1762.39 367.49,1774.27 1259.09,1780.06 1585.61,1780.17 1567.67,1807.4 468.31,1943.15 1607.3,1963.03 1554.88,1967.87 1579.84,1986.52 1157.7,2026.43 1418.51,2083.02 1329.06,2084.79 74.61,2100.63 153.35,2100.63 1570.67,2100.63 1458.1,2106.01 571.83,2139.73 572.82,2171.33 113.98,2179.37 271.46,2179.37 507.68,2179.37 1720.99,2188.23 572.82,2203.33 1724.39,2244.21 74.61,2258.11 153.35,2258.11 310.83,2258.11 468.31,2258.11 1413.19,2258.11 1728.3,2294.71 1438.81,2322.92 113.98,2336.85 271.46,2336.85 507.68,2336.85 572.65,2337.43 1373.82,2336.85 1610.04,2336.85 1724.38,2352.72 572.65,2373.04 1448.95,2387.58 1723.6,2395.84 572.65,2411.48 1399.5,2411.03 74.61,2415.59 153.35,2415.59 232.09,2415.59 310.83,2415.59 468.31,2415.59 1649.41,2415.59 1714.61,2474.44 113.98,2494.33 350.2,2494.33 1713.57,2531.83 1263.46,2560.44 74.61,2573.07 153.35,2573.07 232.09,2573.07 310.83,2573.07 389.57,2573.07 1649.41,2573.07 571.12,2578.35 464.07,2582.86 1600.59,2585.93 1717.74,2587.13 1263.9,2606.27 570.19,2609.23 1567.94,2616.2 417.35,2618.94 1715.65,2641.39 1245.61,2650.25 113.98,2651.81 350.2,2651.81 1175.63,2676.37 1217.6,2678.27 1522.44,2679.44 1711.02,2689.82 1072.24,2708.16 338.69,2720.08 1200.65,2720.12 1238.54,2724.67 1679.55,2726.04 1524.62,2726.85 74.61,2730.55 153.35,2730.55 389.57,2730.55 1570.67,2730.55 520.22,2800.97 409.66,2805.84 113.98,2809.29 586.42,2809.29 637.08,2819.64 1201.03,2821.39 1166.14,2822.84 769.63,2832.69 1114.15,2833.5 1235.49,2847.86 1285.42,2853.85 667.76,2865.87 74.61,2888.03 468.31,2888.03 625.79,2888.03 1413.19,2888.03 1229.49,2892.8 521.99,2894.93 1292.47,2895.97 661.98,2928.76 428.94,2966.77 507.68,2966.77 1216.34,2966.77 1295.08,2966.77 1373.82,2966.77 580.26,2979.5
  other v2: 846.61,1584.3
KR_0: DD1.3 U0.11 | length 991.7
  Top Layer w7: DD1.3 389,2096.14 v1(418.83,2066.31) ; U0.11 693.62,1786.01 787.22,1879.61 816.39,1879.61 839.86,1903.08 839.86,1982.07 v1(838.97,1982.95)
  Bottom Layer w7: v1(418.83,2066.31) 418.83,2027.36 448.6,1997.58 824.34,1997.58 v1(838.97,1982.95)
KR_1: DD2.3 U0.10 | length 364
  Top Layer w7: U0.10 709.36,1783.37 791.73,1865.74 894.09,1865.74 907.03,1878.68 DD2.3
KR_2: DD3.3 U0.9 | length 393.7
  Top Layer w7: U0.9 725.11,1780.73 797.12,1852.74 1020.67,1852.74 1037.58,1835.82 1039.55,1835.82 1051.8,1823.58 DD3.3
KR_3: DD4.3 U0.8 | length 506.4
  Top Layer w7: U0.8 740.86,1778.1 799.84,1837.08 991.6,1837.08 1009,1819.67 v1(1011.01,1819.67) ; v1(1011.01,1951.16) 1029.65,1969.8 1041.84,1969.8 DD4.3
  Bottom Layer w7: v1(1011.01,1819.67) v1(1011.01,1951.16)
NetC8_1: C8.1 R11.2 U3.4 U3.8 | length 743.7
  Top Layer w20: v2(991.38,168.69) 1086.07,74 v2(1410,74)
  Bottom Layer w20: U3.8 1393.22,55 1410,71.78 v2(1410,74)
  Bottom Layer w30: R11.2@951.74,129.06 v2(991.38,168.69) 1030.71,208.02 1052.43,208.02 1057.76,213.35 1107.94,213.35 1116.3,205 U3.4
NetC11_2: C11.2 R15.1 R18.1 SW10.B | length 443.7
  Top Layer w7: SW10.B 1246.91,2295.32 1246.91,2095.79 1296.39,2046.31 1297.37,2046.31 1305.68,2038 C11.2 1310.8,2031.89 1310.8,1989.22 R18.1 R15.1
NetC12_2: C12.2 R16.2 R19.2 SW10.A | length 538.5
  Top Layer w7: R16.2 1207.5,1988.71 R19.2@1253.84,1988.71 ; R19.2 1254.94,1991.26 C12.2 1254.94,2069.36 1233.91,2090.4 1233.91,2380.74 SW10.A
NetC20_1: C20.1 C21.1 U4.5 | length 129.2
  Top Layer w20: U4.5 1155.7,1171.07 C21.1@1231.32,1171.07 ; C21.1 C21.1@1231.32,1171.07 ; C20.1 1231.5,1171.25 C21.1@1231.32,1171.07
NetD1_1: D1.1 R76.1 | length 89.8
  Top Layer w15: D1.1 1488.97,333.94 1499.77,344.75 1500.76,344.75 1518.13,362.13 1518.13,404.01 R76.1
NetD2_2: D2.2 R20.2 | length 118.7
  Bottom Layer w20: D2.2 704.23,1924.68 719.82,1909.09 741.36,1909.09 787.4,1863.05 789.93,1863.05 791.74,1861.24 R20.2
NetDD1_1: DD1.1 SW2.2 | length 486.4
  Top Layer w7: DD1.1 182.89,2420.05 SW2.2
NetDD1_2: DD1.2 SW4.1 | length 251.6
  Top Layer w7: DD1.2 291.19,2017.4 v1(411.93,1896.66)
  Bottom Layer w7: v1(411.93,1896.66) 443.7,1896.66 450.17,1903.14 SW4.1
NetDD2_1: DD2.1 SW1.2 | length 1224.1
  Top Layer w7: DD2.1 869.63,2002.03 878.13,2010.52 1129.8,2010.52 1148.23,1992.09 v2(1148.23,1988.33)
  Bottom Layer w7: v2(1148.23,1988.33) 1197.68,1988.33 1228.69,2019.34 1437.49,2019.34 1534.98,2116.83 1534.98,2413.88 SW1.2
NetDD2_2: DD2.2 SW3.2 | length 847.2
  Top Layer w7: v1(940.72,1938.7) 940.72,1904.74 DD2.2
  Bottom Layer w7: SW3.2 540.25,2275.35 448.11,2183.21 448.11,2044.38 481.91,2010.58 868.84,2010.58 v1(940.72,1938.7)
NetP1_A5: P1.A5 R4.1 | length 121.8
  Top Layer w7: P1.A5 994.53,2829.48 994.53,2793.27 1013.8,2774 1013.8,2726.85 R4.1@1019.29,2721.36
NetP1_B5: P1.B5 R7.2 | length 350.6
  Top Layer w7: P1.B5 874.02,2762.57 886.32,2750.27 v1(886.32,2743.99) ; v1(1095.5,2735.5) 1099.91,2735.5 1109.05,2726.36 R7.2
  Bottom Layer w7: v1(886.32,2743.99) 907.93,2722.38 994.32,2722.38 1010.18,2722.38 1023.3,2735.5 v1(1095.5,2735.5)
NetR3_2: R3.2 U4.15 | length 96.5
  Top Layer w20: R3.2 634.87,996.61 729.75,996.61 U4.15
NetR12_1: R12.1 U3.2 | length 82
  Bottom Layer w10: R12.1 1077.41,94.39 1088.01,105 U3.2
NTC_BAT: CN1.2 R8.1 R13.2 U3.1 | length 1612.5
  Top Layer w8: R8.1@1461.59,964.89 R8.1 ; CN1.2 1552.98,960.69 v2(1619.8,960.69)
  Top Layer w30: R8.1@1469.78,956.7 CN1.2
  Bottom Layer w8: R13.2 1077.31,43.25 1089.06,55 1144.61,55 1151.61,48 1151.61,36.68 1158.77,29.53 1518.36,29.53 1621.4,132.57 1621.4,959.09 v2(1619.8,960.69)
R: D2.1 U0.14 | length 341.2
  Top Layer w7: v1(578.74,1874.01) 646.37,1806.38 U0.14
  Bottom Layer w7: 626.19,1874.01 v1(578.74,1874.01) 656.08,1874.01 704.23,1825.86 D2.1
SPI_MISO: R21.2 U0.25 U4.12 | length 583
  Top Layer w7: R21.2 593.12,1206.29 U4.12 ; U0.25 693.62,1510.06 652.65,1469.09 652.65,1282.9 U4.12@729.25,1206.29
SPI_MOSI: U0.26 U4.11 | length 370
  Top Layer w7: U0.26 709.36,1507.42 665.65,1463.7 665.65,1338.75 728.03,1276.37 U4.11
SPI_MOTION: U0.24 U4.9 | length 304
  Top Layer w7: v2(624.7,1428.92) 624.63,1428.98 624.63,1459.46 677.87,1512.69 U0.24
  Bottom Layer w7: v2(624.7,1428.92) 628.72,1424.9 721.95,1424.9 U4.9
SPI_NCS: U0.28 U4.13 | length 654.6
  Top Layer w7: U0.28 740.86,1542.21 v2(761.17,1521.9)
  Bottom Layer w7: U4.13 685.62,1180.91 685.62,1308.36 594.13,1399.84 594.13,1451.53 620.79,1478.18 717.45,1478.18 v2(761.17,1521.9)
SPI_SCLK: U0.27 U4.10 | length 313.3
  Top Layer w7: U0.27 725.11,1503.44 678.65,1456.97 678.65,1365.72 697.91,1346.45 U4.10
STAT: D1.2 U3.7 | length 393.5
  Top Layer w15: D1.2 1549.6,171.15 v2(1553.61,167.14)
  Bottom Layer w15: U3.7 1491.47,105 v2(1553.61,167.14)
UD+: P1.A6 P1.B6 U0.12 U2.4 U2.6 | length 1686.9
  Top Layer w7: U0.12 677.87,1769.67 676.99,1770.54 676.99,1916.88 615.32,1978.55 615.32,2631.73 644.78,2661.2 644.78,2756.83 654.39,2766.44 677.35,2766.44 ; U2.4 683.79,2760 ; U2.6 U2.6@734.97,2738.99 ; v1(908.35,2768.79) 913.39,2773.83 P1.B6 ; P1.A6 950.35,2829.48 950.35,2799.24 949.91,2798.81 949.91,2782.27 v1@958.49,2773.7 ; v1@956.83,2772.04 v1(960.08,2768.79) 960.08,2731.45 950.32,2721.68 950.32,2721.44 935.62,2706.74 902.09,2706.74 901.85,2706.49 870.78,2706.49 870.54,2706.74 835,2706.74 775.3,2766.44 762.42,2766.44 U2.6@734.97,2738.99 ; 677.35,2766.44 690.23,2766.44 ; 677.35,2766.44 683.79,2760 ; 683.79,2760 690.23,2766.44 ; 690.23,2766.44 707.53,2766.44 U2.6@734.97,2738.99
  Bottom Layer w7: v1(908.35,2768.79) 910.06,2770.51 958.37,2770.51 v1(960.08,2768.79)
UD-: P1.A7 P1.B7 U0.13 U2.1 U2.3 | length 1703.1
  Top Layer w7: U0.13 662.12,1769.67 662.99,1770.54 662.99,1911.08 601.32,1972.75 601.32,2637.53 630.78,2667 630.78,2762.63 648.59,2780.44 677.35,2780.44 ; U2.3 683.79,2786.88 ; U2.1 U2.1@734.97,2807.89 ; P1.A7 933.07,2748.72 936.32,2745.47 936.32,2727.24 929.82,2720.74 896.3,2720.74 896.05,2720.49 876.58,2720.49 876.34,2720.74 840.8,2720.74 781.1,2780.44 762.42,2780.44 U2.1@734.97,2807.89 ; P1.B7 972.44,2791.96 987.84,2776.56 987.84,2749.13 v1(984.59,2745.88) ; 677.35,2780.44 690.23,2780.44 ; 677.35,2780.44 683.79,2786.88 ; 683.79,2786.88 690.23,2780.44 ; 690.23,2780.44 707.53,2780.44 U2.1@734.97,2807.89
  Bottom Layer w7: v1@937.25,2744.55 983.25,2744.55 v1(984.59,2745.88)
  other v1: 933.07,2745.88
V_BAT: C7.1 CN1.1 R13.1 R34.2 R76.2 SW0.1 SW0.4 U3.5 | length 4565.2
  Top Layer w15: v2(1425.36,407.69) 1425.68,408 1488.66,408 R76.2
  Top Layer w20: R34.2 557.37,1287.49 489.8,1219.92 489.8,628.9 849.82,268.87 v2(924.86,268.87)
  Top Layer w30: v2(1499.74,870.2) v2@1499.74,873.98 ; CN1.1 CN1.1@1533.25,907.49 ; v2@1499.74,873.98 CN1.1@1533.25,907.49 ; v2@1499.74,873.98 1499.74,907.49 CN1.1@1533.25,907.49
  Bottom Layer w15: v2(924.86,268.87) 904.71,248.72 904.71,67.19 928.65,43.25 R13.1
  Bottom Layer w30: v2(924.86,268.87) 1406.12,268.87 1407,269.75 ; SW0.1 1249.04,1697.58 1249.04,1703.49 1292.33,1746.78 1526.31,1746.78 ; U3.5 1353.66,205.36 1433.99,205.36 C7.1 1434.35,247.71 ; 1553.57,1719.52 1535.99,1737.09 1526.31,1746.78 ; 1407,269.75 1412.31,269.75 ; 1407,269.75 1434.35,297.1 ; 1412.31,269.75 1434.35,269.75 ; 1412.31,269.75 1434.35,247.71 ; 1434.35,247.71 1434.35,269.75 ; 1434.35,269.75 1434.35,297.1 ; 1434.35,297.1 1434.35,399.01 1425.52,407.84 1397.74,435.62 1397.74,692.26 1499.74,794.26 v2(1499.74,870.2) 1499.74,905.87 1498.35,907.26 v2(1498.12,907.03) 1498.12,988.31 1563.25,1053.45 SW0.4 1563.25,1729.2 1545.68,1746.78 1526.31,1746.78
V_POWER: C10.1 SW0.3 U1.3 | length 1101.6
  Top Layer w30: C10.1@1361.47,770.59 C10.1 ; U1.3 1362.42,769.4 C10.1 ; v2(1409.09,851.77) 1409.09,815.79 v2(1406.79,813.5) 1403.39,813.5 1361.35,771.46 C10.1
  Bottom Layer w30: v2@1405.77,814.64 SW0.3
VBUS: P1.A4 P1.B4 R11.1 SW0.2 | length 4355.8
  Top Layer w25: P1.B4 846.46,2791.95 ; v2(848.78,2751.74) 846.46,2754.07 v2@846.46,2758.89 ; P1.A4 1039.37,2791.94 v2@1060.23,2771.08 ; v2@846.46,2758.89 846.46,2791.95 ; v2@846.46,2758.89 828.99,2776.36 v2(828.99,2777.17) 829.8,2777.17 833.54,2780.91 835.42,2780.91 846.26,2791.74 846.46,2791.95
  Top Layer w30: v2@1060.23,2771.08 v2(1063.09,2771.08) v2(1099.06,2771.08) 1211.64,2771.08 1254.79,2814.23 1390.14,2814.23 1477.84,2726.53 1477.84,2637.57 1516.23,2599.18 1516.23,2039.75 1457.63,1981.15 1457.63,1756.34 1357.3,1656.01 v2@1323.78,1656.01
  Bottom Layer w25: v2(1063.09,2771.08) 1012.01,2822.16 877.94,2822.16 ; 877.94,2822.16 873.98,2822.16 v2(828.99,2777.17) 828.99,2776.36 848.21,2757.14 848.21,2752.32 v2(848.78,2751.74) 848.78,2793 877.94,2822.16
  Bottom Layer w30: R11.1 838.1,110.76 838.1,271.75 902.75,336.4 1302.51,336.4 1340.91,374.8 1340.91,1012.54 1340.91,1599.86 ; v2(1063.09,2771.08) v2(1099.06,2771.08) ; v2@1327.03,1654.32 SW0.2@1327.03,1690.93 ; SW0.2 SW0.2@1327.03,1690.93 ; 1340.91,1613.74 1340.91,1624.23 1340.91,1638.11 v2(1357.3,1654.5) 1357.3,1660.66 SW0.2@1327.03,1690.93
  other v2: 1323.78,1654.32
VDCIA: C1.2 C16.1 L1.2 U0.3 U0.22 | length 671.4
  Top Layer w7: U0.3 817.58,1663.13 825.52,1655.2 827.39,1655.2 C1.2
  Top Layer w8: C16.1@624.59,1549.81 624.59,1566.68 U0.22@646.31,1588.39
  Top Layer w20: C16.1 625.19,1548.57 625.19,1526.55 v2(625.5,1526.24) ; C1.2 836.23,1646.36 883.05,1646.36 926.06,1603.34 v2(926.06,1587.6) ; 879.19,1645.88 904.97,1620.11 L1.2
  Bottom Layer w20: v2(625.5,1526.24) 674.01,1574.75 797.2,1574.75 826.92,1545.03 883.5,1545.03 v2(926.06,1587.6)
VINTA: C15.1 U0.20 | length 77.8
  Top Layer w7: C15.1@545.99,1660.36 545.99,1654.26 552.86,1647.39 U0.20
VSW: L1.1 U0.4 | length 246.8
  Top Layer w7: U0.4 853.79,1678.88 ; L1.1@900.16,1682.27 899.46,1682.97 857.88,1682.97 ; L1.1@902.7,1689.2 864.11,1689.2 857.88,1682.97 ; L1.1@917.07,1694.23 901.72,1678.88 853.79,1678.88 ; 853.79,1678.88 857.88,1682.97
X32MI: U0.19 Y1.3 | length 206.2
  Top Layer w7: Y1.3 432.84,1711.22 451,1693.07 451,1692.58 464.19,1679.39 570.45,1679.39 586.7,1663.13 595.36,1663.13 U0.19
X32MO: U0.18 Y1.1 | length 152
  Top Layer w7: Y1.1@525.6,1780.62 555.72,1750.49 555.72,1715.44 592.28,1678.88 U0.18
pads on no net: CN1.4 CN1.5 CN2.4 CN2.5 P1.A8 P1.B8 SW1.3 SW2.3 SW3.3 SW4.2 SW4.3 SW10.4 SW10.5 U3.6 U4.1 U4.2 U4.6 U4.16

## Polygon pours and split planes (outlines as drawn)
GND on Bottom Layer "GND" (hatched Horizontal grid 8 track 8, remove dead copper, pour order 1): 0,3080.25 0,0 1755.9,0 1755.9,3080.25
GND on Top Layer "GND" (hatched Horizontal grid 8 track 8, remove dead copper, pour order 0): 0,3080.25 1755.9,3080.25 1755.9,0 0,0

## Keep-outs
Keep-Out Layer:
  circle w10: c1514.04,1807.07 r15.74
  circle w10: c1297.5,1807.07 r15.83
  circle w10: c1519.67,551.18 r66.93
  circle w10: c338.6,551.18 r66.93
  circle w10: c1364.19,2697.43 r66.93
  circle w10: c496,2697.43 r66.93
  lines w10: 751.09,3080.16 646.64,3080.16 cw(c646.64,3080.25) 646.55,3080.25 ccw(c921.31,1276.62) 373.97,3017.03 374.02,3017.03 374.02,2866.14 cw(c275.59,2866.14) 177.17,2866.14 177.17,2960.07 176.96,2960.07 ccw(c961.45,599.38) 0,2893.7 0,2007.87 102.36,2007.87 102.36,519.69 ccw(c181.1,519.69) 181.1,440.94 535.43,440.94 cw(c535.43,362.2) 614.17,362.2 614.17,78.74 ccw(c692.91,78.74) 692.91,0 1755.91,0 1755.91,2767.72 ; 1134.65,3080.15 1237,3080.15 ccw(c1237,3080.25) 1237.1,3080.25 cw(c970.53,1365.6) 1468.5,3027.86 1468.5,2846.46 ccw(c1547.24,2846.46) 1547.24,2767.72 1755.91,2767.72 ; 1755.9,2767.72 ccw(c1755.9,2767.72) 1755.91,2767.72 ; 671.26,2078.74 671.26,2618.11 750,2618.11 750,2677.17 1135.83,2677.17 1135.83,2618.11 1214.57,2618.11 1214.57,2078.74 1135.83,2078.74 1135.83,2047.24 750,2047.24 750,2078.74 671.26,2078.74 ; 765.75,755.91 765.75,1476.38 1120.08,1476.38 1120.08,755.91 765.75,755.91

## Other copper
Top Layer:
  rectangle net GND: 342.49,1609.77 419.17,1645.2
  rectangle net GND: 354.3,1597.48 373.96,1669.47
Bottom Layer:
  rectangle net GND: 1189.41,44.2 1303.3,232.21
  rectangle net GND: 623.3,1611.08 761.45,1743.24
Multi-Layer:
  pour cut-out: 358.3,2007.83 358.3,433.07 102.36,433.07 102.36,2007.86

## Silkscreen, mask and mechanical layers (free items; w line width, h text height)
Top Overlay:
  text "GND" at 1527.14,2069.75 h35
  text "BOOT" at 1491.05,1969.81 h35
  text "3V3" at 1525.89,1867.12 h35
  text "TX2" at 1530.8,1750.64 h35
  text "CH592F-3MODE-MS-T0-1v2" at 771.73,20.25 h35
Bottom Overlay:
  lines w6: 795.75,36.26 984.7,36.26
Mechanical 1:
  circle w10: c338.6,551.18 r66.93
  circle w10: c1519.67,551.18 r66.93
  circle w10: c496,2697.43 r66.93
  circle w10: c1364.19,2697.43 r66.93
  lines w10: 176.96,2960.07 ccw(c982.43,543.44) 0,2893.7 0,2007.87 102.36,2007.87 102.36,519.69 ccw(c181.1,519.69) 181.1,440.94 535.43,440.94 cw(c535.43,362.2) 614.17,362.2 614.17,78.74 ccw(c692.91,78.74) 692.91,0 1755.91,0 1755.9,2767.72 ; 177.17,2960.1 177.17,2866.14 ccw(c275.59,2866.14) 374.02,2866.14 374.02,3016.68 ; 373.97,3017.03 cw(c919.24,1285.52) 646.55,3080.25 750.99,3080.25 ; 751.09,3080.25 cw(c751.09,3080.16) 751.18,3080.16 751.18,2866.41 1134.65,2866.41 1134.65,3080.15 ; 1134.75,3080.25 1237.1,3080.25 cw(c961.44,1325.44) 1468.5,3027.86 1468.5,2846.46 ccw(c1547.24,2846.46) 1547.24,2767.72 1755.91,2767.72 ; 1755.91,2767.72 1755.91,2767.72 ; 671.26,2078.74 671.26,2618.11 750,2618.11 750,2677.17 1135.83,2677.17 1135.83,2618.11 1214.57,2618.11 1214.57,2078.74 1135.83,2078.74 1135.83,2047.24 750,2047.24 750,2078.74 671.26,2078.74 ; 765.75,755.91 765.75,1476.38 1120.08,1476.38 1120.08,755.91 765.75,755.91

## Text inside footprints (layer, text, board x,y; h text height)
D1: Top Overlay "+" at 1450.89,321.97 h40 r90
D2: Bottom Overlay "B" at 552.23,1918.93 h30 r270; Bottom Overlay "G" at 552.23,1805.93 h30 r270; Bottom Overlay "R" at 757.23,1805.93 h30 r270; Bottom Overlay "1" at 690.23,1753.93 h30 r270